# Altium PCB toto.PcbDoc
Units mm, origin at the board's own origin, x right, y up, seen from the top; angles counter-clockwise.
Board outline 41 x 58.5 mm, 2 copper layers (Top Layer, Bottom Layer); 36 components, 22 nets, 152 pads, 24 vias.
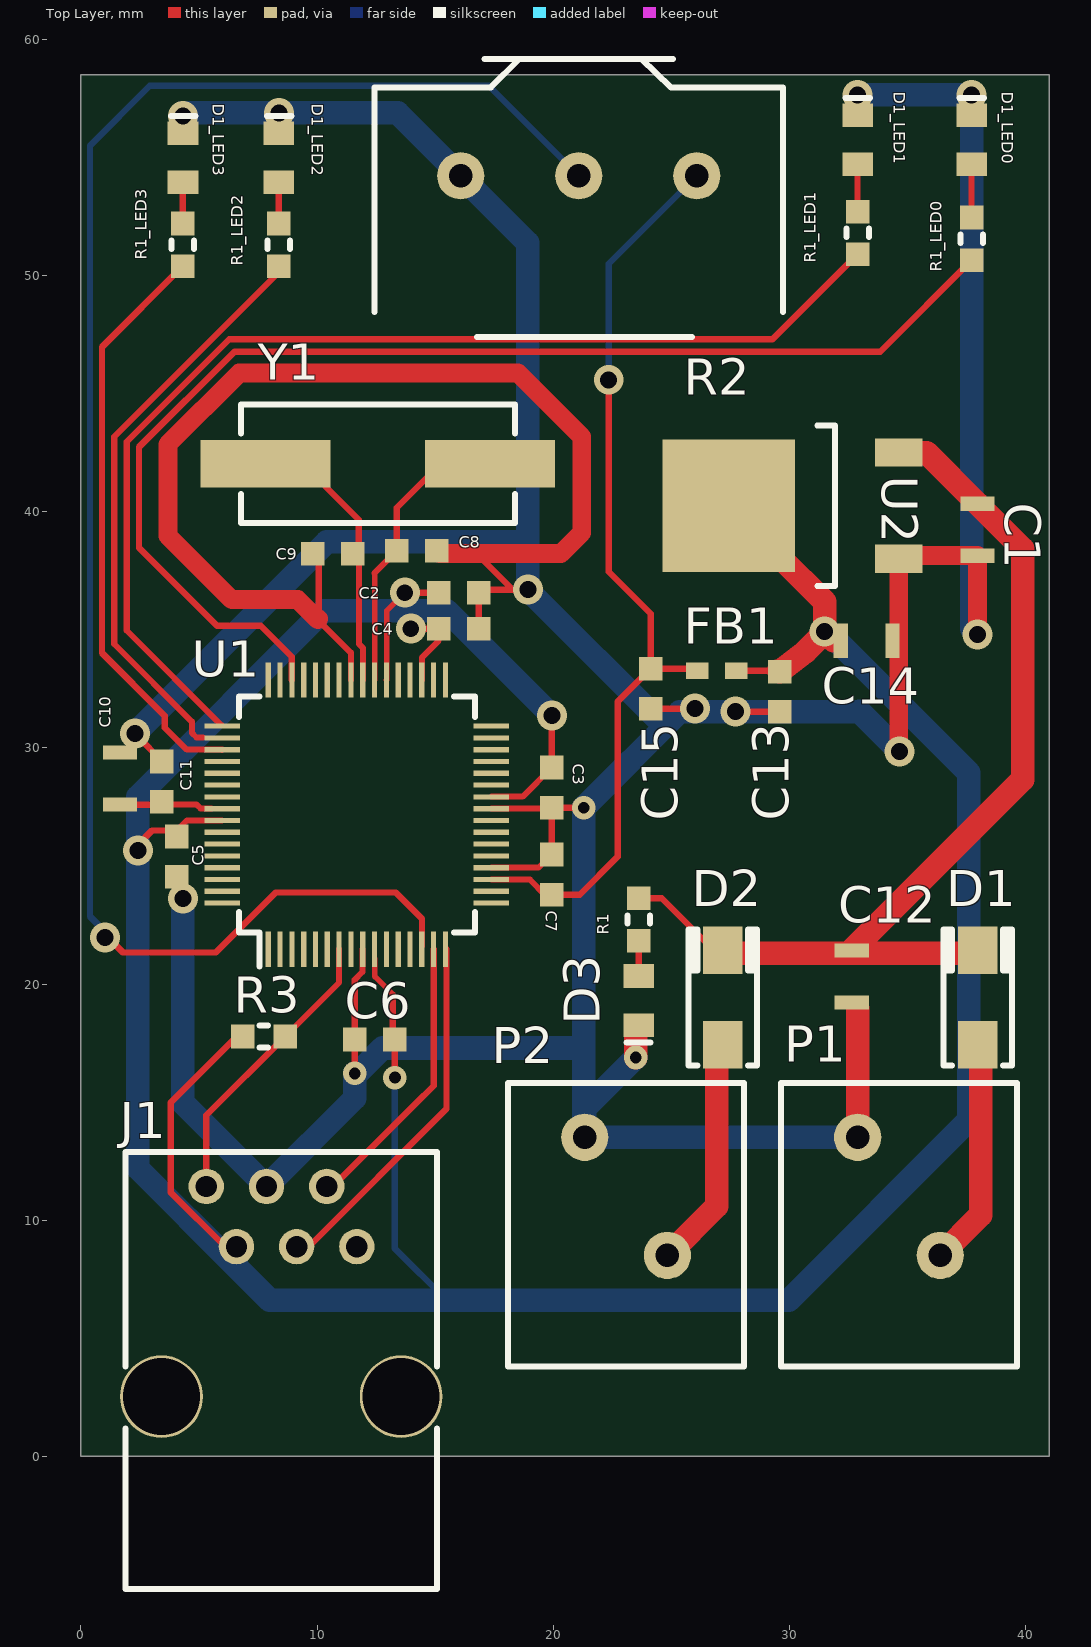
[diagram p0: Top Layer view]
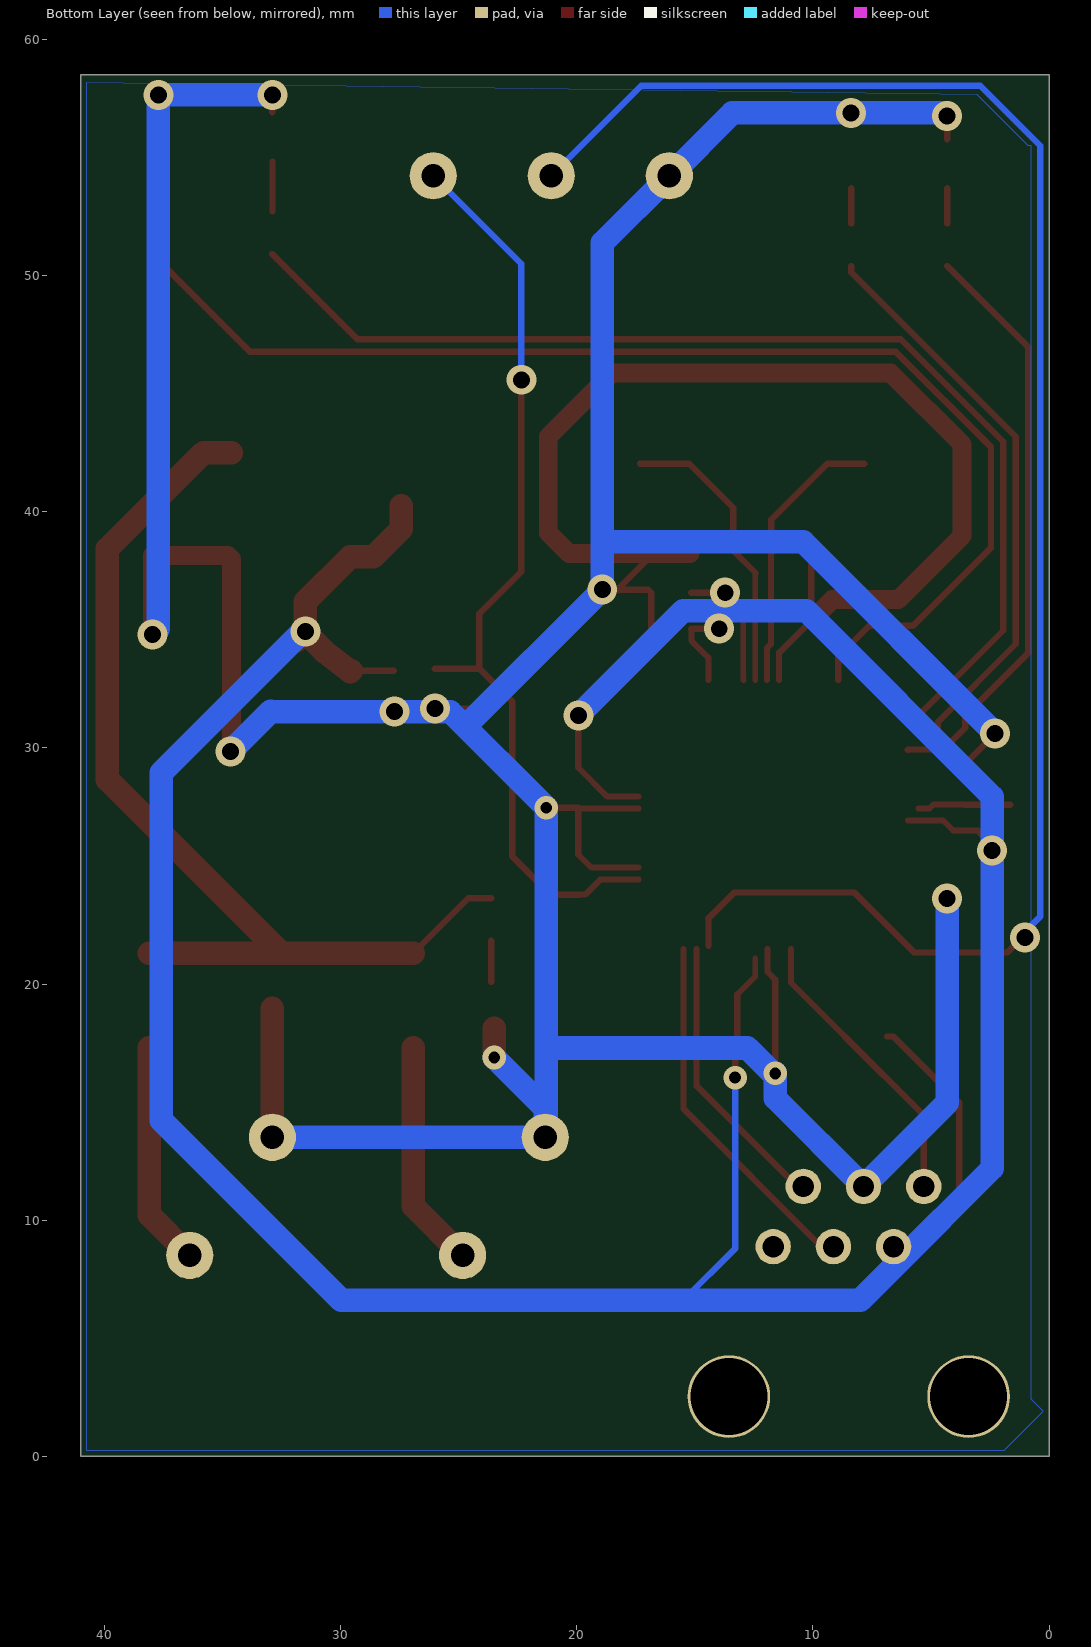
[diagram p1: Bottom Layer view, seen from below]

## Layer stack, top to bottom
Top Solder: solder mask 0.0102, Solder Resist, Dk 3.5
Top Layer: signal copper 0.0356
Dielectric 1: dielectric 0.32, FR-4, Dk 4.8
Bottom Layer: signal copper 0.0356
Bottom Solder: solder mask 0.0102, Solder Resist, Dk 3.5

## Board outline
0,0 41,0 41,58.5 0,58.5

## Design rules (kind name [scope] priority, off if disabled: settings)
Clearance [All] p1: gap=0.254
PolygonConnect [All] p1: connectstyle=Relief reliefconductorwidth=0.254 reliefentries=4 polygonreliefangle="90 Angle" airgapwidth=0.254
RoutingVias [All] p1: holewidth=0.711 width=1.27 viastyle="Through Hole" minholewidth=0.3 minwidth=0.7 maxholewidth=0.73 maxwidth=1.28
SolderMaskExpansion [All] p1: expansion=0.102
UnpouredPolygon [All] p1: allowunpoured=FALSE
Width [All] p1: maxlimit=1.5 minlimit=0.2 preferedwidth=0.254
29 further rules are at their usual default settings.

## Classes and differential pairs
component class LED0: D1_LED0 R1_LED0
component class LED1: D1_LED1 R1_LED1
component class LED2: D1_LED2 R1_LED2
component class LED3: D1_LED3 R1_LED3
component class PIC: C2 C3 C4 C5 C6 C7 C8 C9 C10 C11 J1 R3 U1 Y1
component class POWER: C1 C12 C13 C14 C15 D1 D2 D3 FB1 P1 P2 R1 U2
component class TP2: R2
net class LED[0..3]: LED0 LED1 LED2 LED3
channel class led: LED0 LED1 LED2 LED3

## Components (designator, comment, footprint, x,y, rotation, side; value= is the part's Value field where it differs from the comment)
C1 "10uF" CAPC2012N 37.973,39.243 r90 top
C2 "100nF" CAPC1608N 16.002,36.576 r180 top
C3 "100nF" CAPC1608N 19.939,28.321 r90 top
C4 "100nF" CAPC1608N 16.002,35.052 r180 top
C5 "100nF" CAPC1608N 4.064,25.4 r90 top
C6 "100nF" CAPC1608N 12.446,17.653 r0 top
C7 "100nF" CAPC1608N 19.939,24.638 r270 top
C8 "20pF" CAPC1608N 14.224,38.354 r180 top
C9 "20pF" CAPC1608N 10.668,38.227 r0 top
C10 "10uF" CAPC2012N 1.651,28.702 r270 top
C11 "1uF" CAPC1608N 3.429,28.575 r270 top
C12 "10uF" CAPC2012N 32.639,20.32 r90 top
C13 "10uF" CAPC2012N 33.274,34.544 r180 top
C14 "1uF" CAPC1608N 29.591,32.385 r90 top
C15 "100nF" CAPC1608N 24.13,32.512 r90 top
D1 "GF1A" SMA/DO-214AC_21 37.973,19.431 r270 top
D1_LED0 "Green LED" "LED 0805" 37.719,55.753 r270 top (schematic designator D1)
D1_LED1 "Green LED" "LED 0805" 32.893,55.753 r270 top (schematic designator D1)
D1_LED2 "Green LED" "LED 0805" 8.382,54.991 r270 top (schematic designator D1)
D1_LED3 "Green LED" "LED 0805" 4.318,54.991 r270 top (schematic designator D1)
D2 "GF1A" SMA/DO-214AC_21 27.178,19.431 r270 top
D3 "Green LED" "LED 0805" 23.622,19.304 r90 top
FB1 "600r" INDC1608AN 26.924,33.274 r180 top
J1 "Program / Debug" RJ12_90 11.684,11.43 r270 top
P1 "12V Main" PHOENIX_1985195 32.893,8.509 r0 top
P2 "12V Battery" PHOENIX_1985195 21.336,8.509 r0 top
R1 "470r" RESC1608N 23.622,22.733 r90 top
R1_LED0 "330r" RESC1608N 37.719,51.562 r270 top (schematic designator R1)
R1_LED1 "330r" RESC1608N 32.893,51.816 r270 top (schematic designator R1)
R1_LED2 "330r" RESC1608N 8.382,51.308 r270 top (schematic designator R1)
R1_LED3 "330r" RESC1608N 4.318,51.308 r270 top (schematic designator R1)
R2 "1K" PDB181-K415K-102A2 21.082,54.229 r0 top
R3 "4.7K" RESC1608N 7.747,17.78 r180 top
U1 "PIC32MX764F128H" QFP50P1200X1200X120-64 11.684,27.178 r90 top
U2 "AP1117" TD03B_N 27.432,40.259 r90 top
Y1 "8MHz" XTAL139X50X45 12.573,42.037 r0 top

## Footprints (in the part's own frame and the unit in brackets; to place one, negate y for a bottom-side part, rotate by r counter-clockwise, add the part's x,y. Pads: shape width x height; smd on the part's side, far side on the other; paste and mask are expansions set on the pad)
CAPC1608N [mm]
  rect 1x1 smd: 1(-0.85,0) 2(0.85,0)
CAPC2012N [mm]
  rect 0.6x1.45 smd: 1(-1.1,0) 2(1.1,0)
INDC1608AN [mm]
  rect 0.95x0.7 smd mask+0.102: 1(-0.825,0)
  rect 0.95x0.7 smd: 2(0.825,0)
"LED 0805" [mm]
  rect 1x1.3 smd: 1(1.04,0) 2(-1.04,0)
  rect 2.08x1.3 on Mech1: ""(0,0)
  silkscreen extent -1.78,-0.51 -1.78,0.53
PDB181-K415K-102A2 [mm]
  round 2 hole 1: 1(5,0) 2(0,0) 3(-5,0)
  silkscreen extent -8.65,-6.83 8.65,4.95
PHOENIX_1985195 [mm]
  round 2 hole 1: 1(3.5,0) 2(0,5)
  silkscreen extent -3.25,-4.7 6.75,7.3
QFP50P1200X1200X120-64 [mm]
  rect 1.5x0.22 smd: 1(-5.7,3.75) 2(-5.7,3.25) 3(-5.7,2.75) 4(-5.7,2.25) 5(-5.7,1.75) 6(-5.7,1.25) 7(-5.7,0.75) 8(-5.7,0.25) 9(-5.7,-0.25) 10(-5.7,-0.75) 11(-5.7,-1.25) 12(-5.7,-1.75) 13(-5.7,-2.25) 14(-5.7,-2.75) 15(-5.7,-3.25) 16(-5.7,-3.75) 33(5.7,-3.75) 34(5.7,-3.25) 35(5.7,-2.75) 36(5.7,-2.25) 37(5.7,-1.75) 38(5.7,-1.25) 39(5.7,-0.75) 40(5.7,-0.25) 41(5.7,0.25) 42(5.7,0.75) 43(5.7,1.25) 44(5.7,1.75) 45(5.7,2.25) 46(5.7,2.75) 47(5.7,3.25) 48(5.7,3.75)
  rect 0.22x1.5 smd: 17(-3.75,-5.7) 18(-3.25,-5.7) 19(-2.75,-5.7) 20(-2.25,-5.7) 21(-1.75,-5.7) 22(-1.25,-5.7) 23(-0.75,-5.7) 24(-0.25,-5.7) 25(0.25,-5.7) 26(0.75,-5.7) 27(1.25,-5.7) 28(1.75,-5.7) 29(2.25,-5.7) 30(2.75,-5.7) 31(3.25,-5.7) 32(3.75,-5.7) 49(3.75,5.7) 50(3.25,5.7) 51(2.75,5.7) 52(2.25,5.7) 53(1.75,5.7) 54(1.25,5.7) 55(0.75,5.7) 56(0.25,5.7) 57(-0.25,5.7) 58(-0.75,5.7) 59(-1.25,5.7) 60(-1.75,5.7) 61(-2.25,5.7) 62(-2.75,5.7) 63(-3.25,5.7) 64(-3.75,5.7)
  rect 10x10 on Mech1: ""(0,0)
  silkscreen extent -6.43,-5 5,5
RESC1608N [mm]
  rect 1x1 smd: 1(-0.9,0) 2(0.9,0)
  silkscreen extent -0.18,-0.48 0.18,0.48
RJ12_90 [mm]
  round 1.5 hole 0.9: 1(0,-6.375) 2(2.55,-5.1) 3(0,-3.825) 4(2.55,-2.55) 5(0,-1.275) 6(2.55,0)
  round 3.5 hole 3.25: 7(8.9,-8.275) 8(8.9,1.875)
  silkscreen extent -1.45,-9.8 17.05,3.4
SMA/DO-214AC_21 [mm]
  rect 2x1.68 smd: 1(2,0) 2(-2,0)
  rect 5.74x2.9 on Mech1: ""(0,0)
  silkscreen extent -2.88,-1.45 2.88,1.45
TD03B_N [mm]
  rect 1.2x2 smd: 1(-2.25,-7.2) 3(2.25,-7.2)
  rect 5.6x5.6 smd: 4(0,0)
  round 0.5 on Top Overlay: ""(-3.4,-7.2)
  rect 6.8x10.4 on Mech1: ""(0,-2.6)
  silkscreen extent -3.4,-4.5 3.4,-3.75
XTAL139X50X45 [mm]
  rect 5.5x2 smd: 1(-4.75,0) 2(4.75,0)
  silkscreen extent -5.8,-2.5 5.8,2.5

## Part data
C1 C2 C3 C4 C5 C6 C7 C8 C9 C10 C11 C12 C13 C14 C15: library part Cap, "Capacitor"
D1 D2: library part Diode, "Default Diode"
D1_LED0 D1_LED1 D1_LED2 D1_LED3: library part LED0, "Typical INFRARED GaAs LED"
D3: library part LED2, "Typical RED, GREEN, YELLOW, AMBER GaAs LED"
FB1: library part Inductor, "Inductor"
J1: library part Component_1
P1 P2: library part "Header 2", "Header, 2-Pin"
R1 R1_LED0 R1_LED1 R1_LED2 R1_LED3 R3: library part Res1, "Resistor"
R2: library part RPot, "Potentiometer"
U2: "1A LDO, 18V input, DPAK"
Y1: library part XTAL, "Crystal Oscillator"

## Via types
v1: diameter 1.27, hole 0.72, Top Layer to Bottom Layer, 18 vias
v2: diameter 1, hole 0.5, Top Layer to Bottom Layer, 4 vias
v3: diameter 1.27, hole 0.711, Top Layer to Bottom Layer, 2 vias

## Nets (pads, with @x,y where several pads share a name; then routed paths per layer and width w, separated by ;. In a path a pad name is that pad's centre, name@x,y a point inside that pad or via, vN(x,y) a via of type N, cw(c..) or ccw(c..) an arc to the next point about the centre after c; other vN are vias at no path point)
ALIM: D1.1 P1.1 | length 9.5
  Top Layer w1: P1.1 38.1,10.216 D1.1@38.1,17.304
BATTERY: D2.1 P2.1 | length 9.7
  Top Layer w1: P2.1 26.924,10.597 D2.1@26.924,17.304
GND: C1.1 C2.1 C3.1 C4.1 C5.1 C6.1 C7.1 C8.1 C9.1 C10.1 C11.1 C12.1 C13.1 C14.1 C15.1 D1_LED0.2 D1_LED1.2 D1_LED2.2 D1_LED3.2 D3.2 J1.3 P1.2 P2.2 R2.3 U1.9 U1.20 U1.25 U1.41 U2.1 | length 260.7
  Top Layer w0.254: 10.033,35.433 11.434,34.032 U1.41 ; 11.596,20.19 11.925,20.519 11.925,21.469 U1.9 ; U1.20 19.379,24.928 C7.1 ; U1.25 C3.1@19.896,27.428 ; P1.2@32.639,13.763 P1.2 ; C12.1 C12.1@32.893,18.966 ; U2.1 U2.1@34.766,38.143
  Top Layer w0.27: v1(2.286,30.607) 3.556,29.337 C11.1@3.556,29.298 ; D1_LED3.2@4.318,55.777 D1_LED3.2 v1(4.318,56.769) ; 10.072,35.472 C9.1@10.072,38.227 ; v2(11.596,16.217) C6.1 11.596,20.19 ; 16.764,38.227 v1@18.288,36.703 ; C4.1 C2.1 16.979,36.703 v1@18.288,36.703 ; v1(18.923,36.703) v1@18.288,36.703 ; C3.1@19.896,27.428 C3.1 ; C7.1 C3.1 ; v2(21.297,27.471) C3.1 ; C15.1 v1(25.996,31.662) ; v1(27.725,31.535) C14.1 ; D1_LED1.2@32.893,56.92 v1(32.893,57.658)
  Top Layer w0.8: 10.072,35.472 10.033,35.433 9.183,36.283 6.389,36.283 3.683,38.989 3.683,42.852 6.704,45.874 18.515,45.874 21.209,43.18 21.209,39.116 20.32,38.227 16.764,38.227 C8.1@15.201,38.227 ; U2.1 34.632,29.884 v1(34.671,29.845) ; U2.1@34.766,38.143 C1.1 v1(37.973,34.798)
  Top Layer w1: v2(23.495,16.891) D3.2@23.495,18.137 ; P1.2 C12.1@32.893,18.966
  Bottom Layer w0.27: v1@37.719,35.052 v1(37.973,34.798)
  Bottom Layer w1: v1(2.286,30.607) 10.414,38.735 18.923,38.735 ; v1(4.318,23.622) 4.318,14.971 J1.3 11.596,15.167 v2(11.596,16.217) 11.699,16.217 12.777,17.295 21.297,17.295 ; v1@4.318,56.896 13.415,56.896 v1(16.082,54.229) 18.923,51.388 18.923,38.735 ; P2.2@21.297,13.548 21.297,17.295 ; P2.2 P1.2 ; P2.2@21.336,13.548 21.336,14.732 v2(23.495,16.891) ; 24.687,30.939 v1(18.923,36.703) 18.923,38.735 ; v1(32.893,57.658) v1(37.719,57.658) v1@37.719,35.052 ; 32.969,31.535 v1(27.725,31.535) 25.361,31.535 v2(21.297,27.471) 21.297,17.295 ; 32.969,31.547 v1(34.671,29.845)
  other v1: 8.382,56.896
LED0: R1_LED0.2 U1.46 | length 52.2
  Top Layer w0.27: U1.46 8.934,33.865 7.62,35.179 5.763,35.179 2.461,38.481 2.461,42.746 6.501,46.786 33.843,46.786 R1_LED0.2
LED1: R1_LED1.2 U1.49 | length 47.9
  Top Layer w0.254: 1.937,34.975 U1.49@5.946,30.965
  Top Layer w0.27: 1.937,34.975 1.937,42.963 6.284,47.31 29.287,47.31 R1_LED1.2
LED2: R1_LED2.2 U1.50 | length 24.6
  Top Layer w0.254: 1.413,34.401 4.699,31.115 4.699,30.639 4.895,30.443 5.163,30.443
  Top Layer w0.27: 1.413,34.401 1.413,43.18 8.382,50.149 R1_LED2.2
LED3: R1_LED3.2 U1.51 | length 24.9
  Top Layer w0.254: 3.556,30.861 4.488,29.929 U1.51
  Top Layer w0.27: 3.556,30.861 3.556,31.356 0.889,34.023 0.889,46.979 R1_LED3.2 ; U1.51 U1.51
MCLR: J1.1 R3.1 U1.7 | length 12.4
  Top Layer w0.254: R3.1 10.934,20.067 U1.7
  Top Layer w0.27: J1.1 5.309,14.442 R3.1
NetC10_2: C10.2 C11.2 U1.56 | length 3.9
  Top Layer w0.254: C11.2@3.556,27.598 4.904,27.598 5.066,27.436 U1.56@5.521,27.436
  Top Layer w0.27: C10.2 1.655,27.598 C11.2@3.556,27.598
NetD1_LED0_1: D1_LED0.1 R1_LED0.1 | length 2.4
  Top Layer w0.254: R1_LED0.1 D1_LED0.1@37.719,54.84
NetD1_LED1_1: D1_LED1.1 R1_LED1.1 | length 2.1
  Top Layer w0.254: R1_LED1.1 D1_LED1.1@32.893,54.84
NetD1_LED2_1: D1_LED2.1 R1_LED2.1 | length 1.5
  Top Layer w0.27: R1_LED2.1 D1_LED2.1@8.382,53.697
NetD1_LED3_1: D1_LED3.1 R1_LED3.1 | length 1.5
  Top Layer w0.27: R1_LED3.1 D1_LED3.1@4.318,53.697
NetD3_1: D3.1 R1.1 | length 1.7
  Top Layer w0.27: D3.1@23.622,20.09 R1.1
NetR2_2: R2.2 U1.14 | length 74.2
  Top Layer w0.254: U1.14@14.434,21.619 14.434,22.777
  Top Layer w0.27: v1(1.016,21.971) 1.524,21.971 1.333,21.78 1.778,21.336 5.715,21.336 8.255,23.876 13.335,23.876 14.434,22.777
  Bottom Layer w0.27: v1(1.016,21.971) 1.27,21.971 0.381,22.86 0.381,55.499 2.921,58.039 17.272,58.039 v1(21.082,54.229)
PGC: J1.5 U1.15 | length 12.1
  Top Layer w0.27: J1.5 10.668,11.43 14.16,14.922 14.934,15.696 U1.15
PGD: J1.4 U1.16 | length 15.5
  Top Layer w0.254: 15.473,14.711 U1.16@15.473,21.478
  Top Layer w0.27: J1.4 9.642,8.88 15.473,14.711
V3P3: C2.2 C3.2 C4.2 C5.2 C6.2 C13.2 C14.2 FB1.1 J1.2 R3.2 U1.10 U1.26 U1.35 U1.38 U1.57 U2.4 | length 161.7
  Top Layer w0.24: U1.10@12.446,21.082 12.446,20.32 13.208,19.558 ; U1.38@12.937,32.878 12.95,32.891 12.95,35.175 12.954,35.179 12.954,35.814 v3(13.716,36.576)
  Top Layer w0.254: C5.2@4.064,26.504 4.488,26.928 U1.57 ; U1.35 14.434,33.828 15.152,34.546 C4.2 ; U1.26@17.384,27.936 18.704,27.936 C3.2
  Top Layer w0.27: v1(2.413,25.654) 2.413,25.908 3.009,26.504 C5.2@4.064,26.504 ; J1.2 6.106,8.88 3.81,11.176 3.81,14.986 6.604,17.78 R3.2 ; 13.208,19.558 13.208,17.741 C6.2 v2(13.296,16.041) ; v3(13.716,36.576) C2.2 ; v3(13.97,35.052) C4.2 ; C3.2 v1(19.939,31.369) ; FB1.1 C14.2@29.552,33.274
  Top Layer w1: U2.4 27.432,39.286 28.617,38.101 29.59,38.101 31.496,36.195 v1(31.496,34.925) C13.2@31.877,34.544 ; C14.2@29.552,33.274 C14.2 30.691,34.081 v1@31.492,34.882
  Bottom Layer w0.27: v2(13.296,16.041) 13.296,8.802 15.494,6.604
  Bottom Layer w1: J1.2 6.584,8.021 ; v1(19.939,31.369) 15.494,35.814 10.282,35.814 2.405,27.937 2.405,12.2 6.584,8.021 ; v1@31.623,34.925 37.592,28.956 37.592,14.224 29.972,6.604 15.494,6.604 8.001,6.604 6.584,8.021
V3P3A: C7.2 C15.2 FB1.2 R2.1 U1.19 | length 39.8
  Top Layer w0.254: U1.19@17.384,24.42 17.385,24.419 19.015,24.419 19.646,23.788 C7.2
  Top Layer w0.27: C7.2 21.121,23.788 22.733,25.4 22.733,31.965 C15.2 ; v1(22.352,45.593) 22.352,37.465 24.13,35.687 C15.2 ; FB1.2@26.011,33.362 C15.2
  Bottom Layer w0.27: v1(22.352,45.593) 22.352,50.499 R2.1
V5: C1.2 C12.2 D1.2 D2.2 R1.2 U2.3 | length 42.4
  Top Layer w0.27: R1.2 24.595,23.633 D2.2@26.924,21.304
  Top Layer w1: D2.2@26.924,21.304 D1.2@38.1,21.304 ; C12.2 39.878,28.659 39.878,38.438 C1.2 35.807,42.509 U2.3
X1: C8.2 U1.39 Y1.2 | length 12.4
  Top Layer w0.24: U1.39@12.443,32.878 12.443,37.373 12.418,37.398 C8.2
  Top Layer w0.27: C8.2 13.374,40.171 15.24,42.037 Y1.2
X2: C9.2 U1.40 Y1.1 | length 11.8
  Top Layer w0.254: C9.2@11.772,38.227 11.772,34.412 11.942,34.242 U1.40@11.942,32.878
  Top Layer w0.27: Y1.1 9.398,42.037 11.772,39.663 C9.2@11.772,38.227
pads on no net: D1. D1_LED0. D1_LED1. D1_LED2. D1_LED3. D2. D3. J1.6 J1.7 J1.8 U1. U1.1 U1.2 U1.3 U1.4 U1.5 U1.6 U1.8 U1.11 U1.12 U1.13 U1.17 U1.18 U1.21 U1.22 U1.23 U1.24 U1.27 U1.28 U1.29 U1.30 U1.31 U1.32 U1.33 U1.34 U1.36 U1.37 U1.42 U1.43 U1.44 U1.45 U1.47 U1.48 U1.52 U1.53 U1.54 U1.55 U1.58 U1.59 U1.60 U1.61 U1.62 U1.63 U1.64 U2.

## Polygon pours and split planes (outlines as drawn)
GND on Bottom Layer "Bottom-layer-GND" (solid, shelved, pour order 2): 40.767,58.166 40.767,0.254 1.905,0.254 0.254,1.905 0.762,2.413 0.762,55.499 0.889,55.499 3.048,57.658

## Silkscreen, mask and mechanical layers (free items; w line width, h text height)
Drill Drawing:
  circle w0.254: c49.079,9.525 r0.635
  lines w0.254: 48.444,5.397 48.762,5.397 48.762,5.08 49.397,5.08 49.397,5.397 49.714,5.397 49.714,6.032 49.397,6.032 49.397,6.35 48.762,6.35 48.762,6.032 48.444,6.032 48.444,5.397 ; 48.444,12.7 49.714,12.7 49.714,13.97 48.444,13.97 48.444,12.7 ; 48.444,16.828 48.762,16.828 49.079,16.51 49.397,16.828 49.714,16.828 49.397,17.145 49.714,17.462 49.397,17.462 49.079,17.78 48.762,17.462 48.444,17.462 48.762,17.145 48.444,16.828 ; 48.444,21.59 49.714,21.59 49.079,20.32 48.444,21.59 ; 48.444,24.13 49.079,24.447 49.714,24.13 49.397,24.765 49.714,25.4 49.079,25.082 48.444,25.4 48.762,24.765 48.444,24.13
  lines w0.381: 46.714,3.937 145.24,3.937 ; 46.714,26.797 145.24,26.797 ; 60.706,0.127 60.706,30.607 ; 78.43,0.127 78.43,30.607 ; 112.609,0.127 112.609,30.607 ; 125.458,0.127 125.458,30.607 ; 46.714,0.127 145.24,0.127 145.24,30.607 46.714,30.607 46.714,0.127
  text "Symbol" at 49,27.94 h1.83
  text "Hit Count" at 61.849,27.94 h1.83
  text "Finished Hole Size" at 79.573,27.94 h1.83
  text "Plated" at 113.752,27.94 h1.83
  text "Hole Type" at 126.601,27.94 h1.83
  text "2" at 61.849,24.13 h1.52
  text "0.711mm (27.99mil)" at 79.573,24.13 h1.52
  text "PTH" at 113.752,24.13 h1.52
  text "Round" at 126.601,24.13 h1.52
  text "2" at 61.849,20.32 h1.52
  text "3.250mm (127.95mil)" at 79.573,20.32 h1.52
  text "PTH" at 113.752,20.32 h1.52
  text "Round" at 126.601,20.32 h1.52
  text "4" at 61.849,16.51 h1.52
  text "0.500mm (19.69mil)" at 79.573,16.51 h1.52
  text "PTH" at 113.752,16.51 h1.52
  text "Round" at 126.601,16.51 h1.52
  text "6" at 61.849,12.7 h1.52
  text "0.900mm (35.43mil)" at 79.573,12.7 h1.52
  text "PTH" at 113.752,12.7 h1.52
  text "Round" at 126.601,12.7 h1.52
  text "7" at 61.849,8.89 h1.52
  text "1.000mm (39.37mil)" at 79.573,8.89 h1.52
  text "PTH" at 113.752,8.89 h1.52
  text "Round" at 126.601,8.89 h1.52
  text "18" at 61.849,5.08 h1.52
  text "0.720mm (28.35mil)" at 79.573,5.08 h1.52
  text "PTH" at 113.752,5.08 h1.52
  text "Round" at 126.601,5.08 h1.52
  text "39 Total" at 61.849,1.27 h1.52
Board outline:
  the board outline again, w0.2

## Dimensions
0,58.5 to 0,0 on Drill Drawing
0,-0.254 to 41,0 on Drill Drawing